# Altium PCB 电梯主控板V2.1.PcbDoc
Units mil, origin at the board's own origin, x right, y up, seen from the top; angles counter-clockwise.
Board outline 3518.03 x 3910.03 mil, 2 copper layers (Top Layer, Bottom Layer); 83 components, 106 nets, 399 pads, 129 vias.
Unrouted connection lines stored in the file: 6.
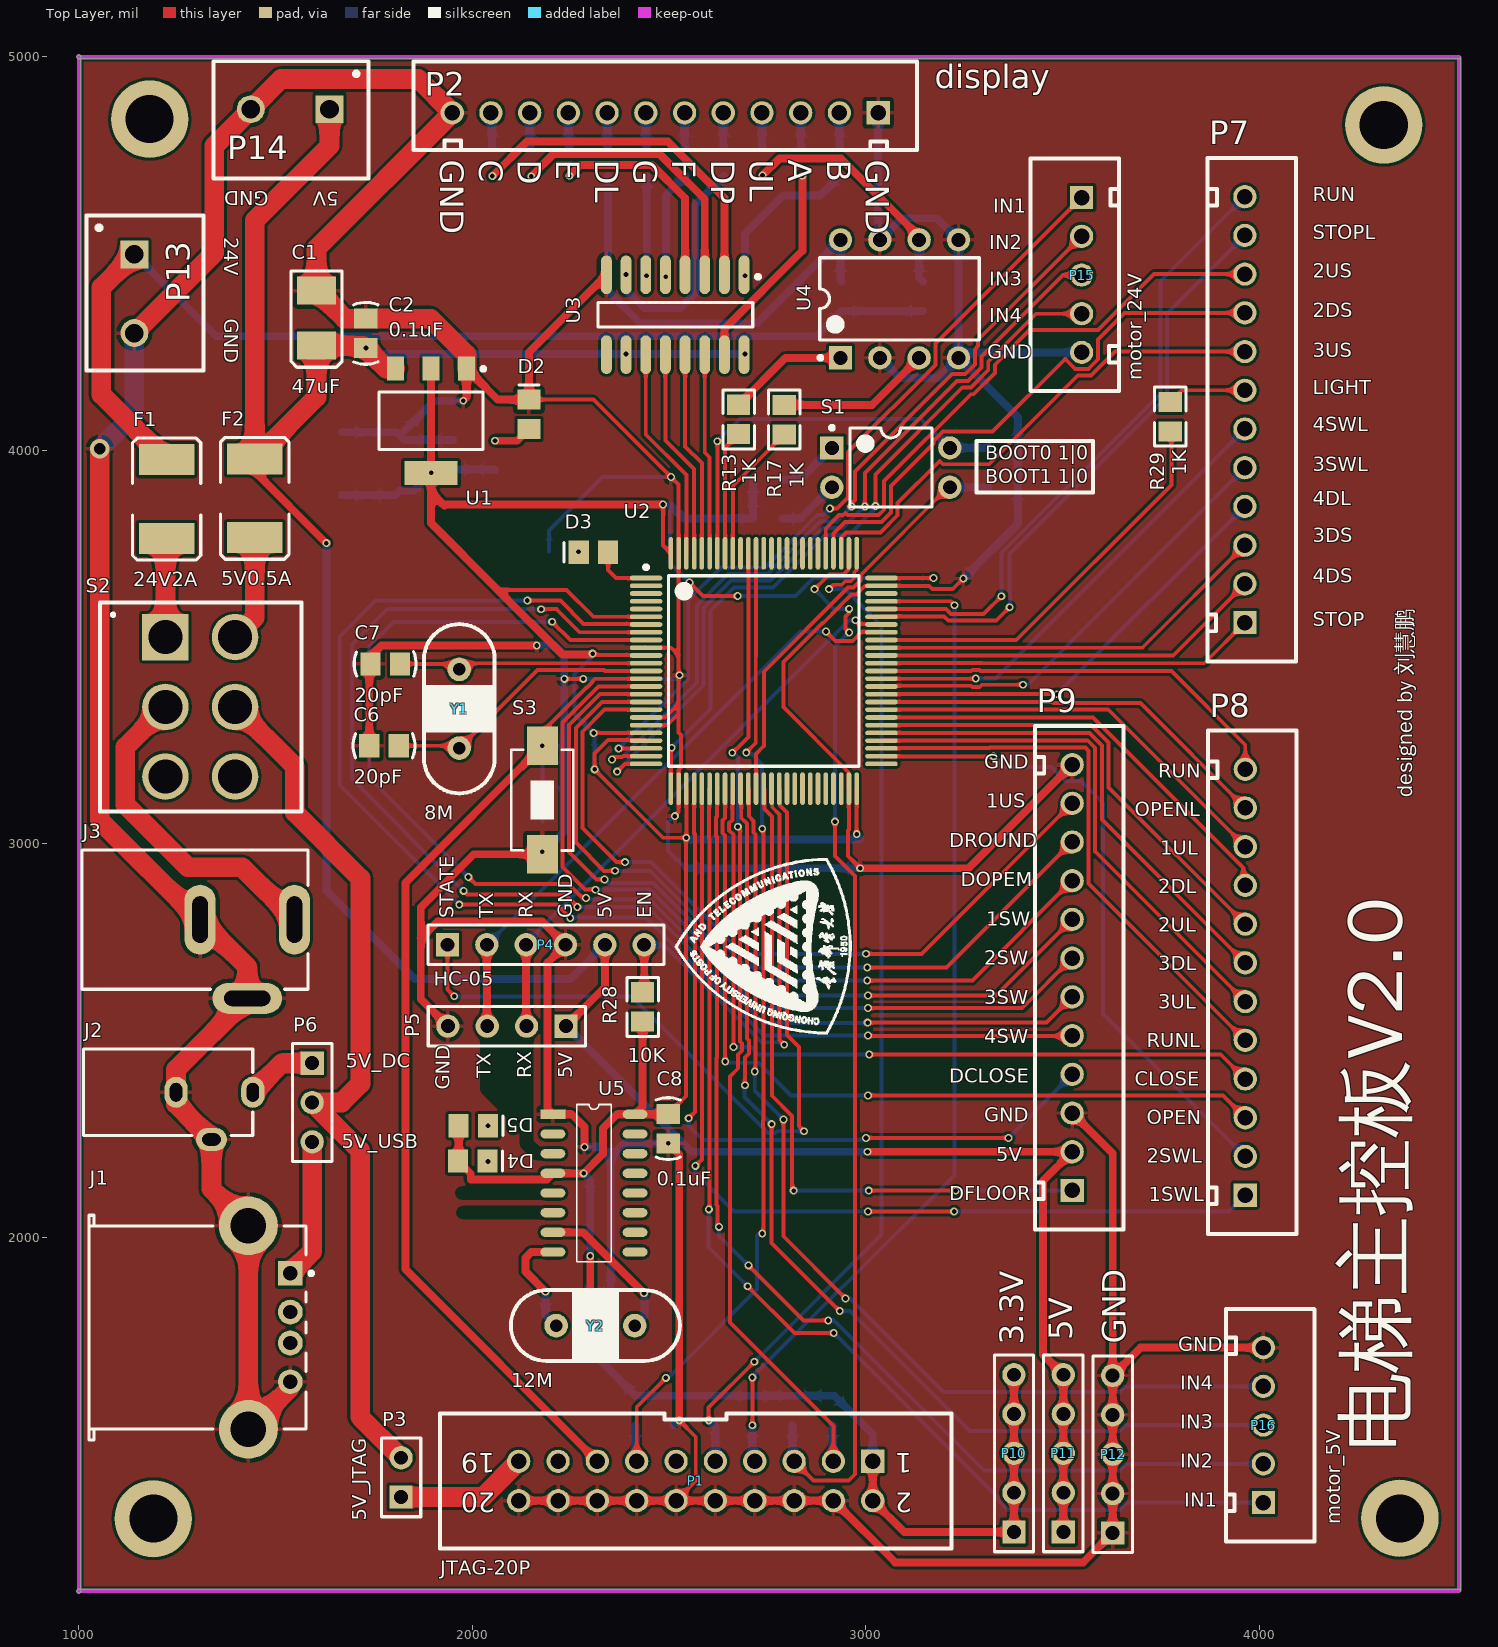
[diagram p0: Top Layer view]
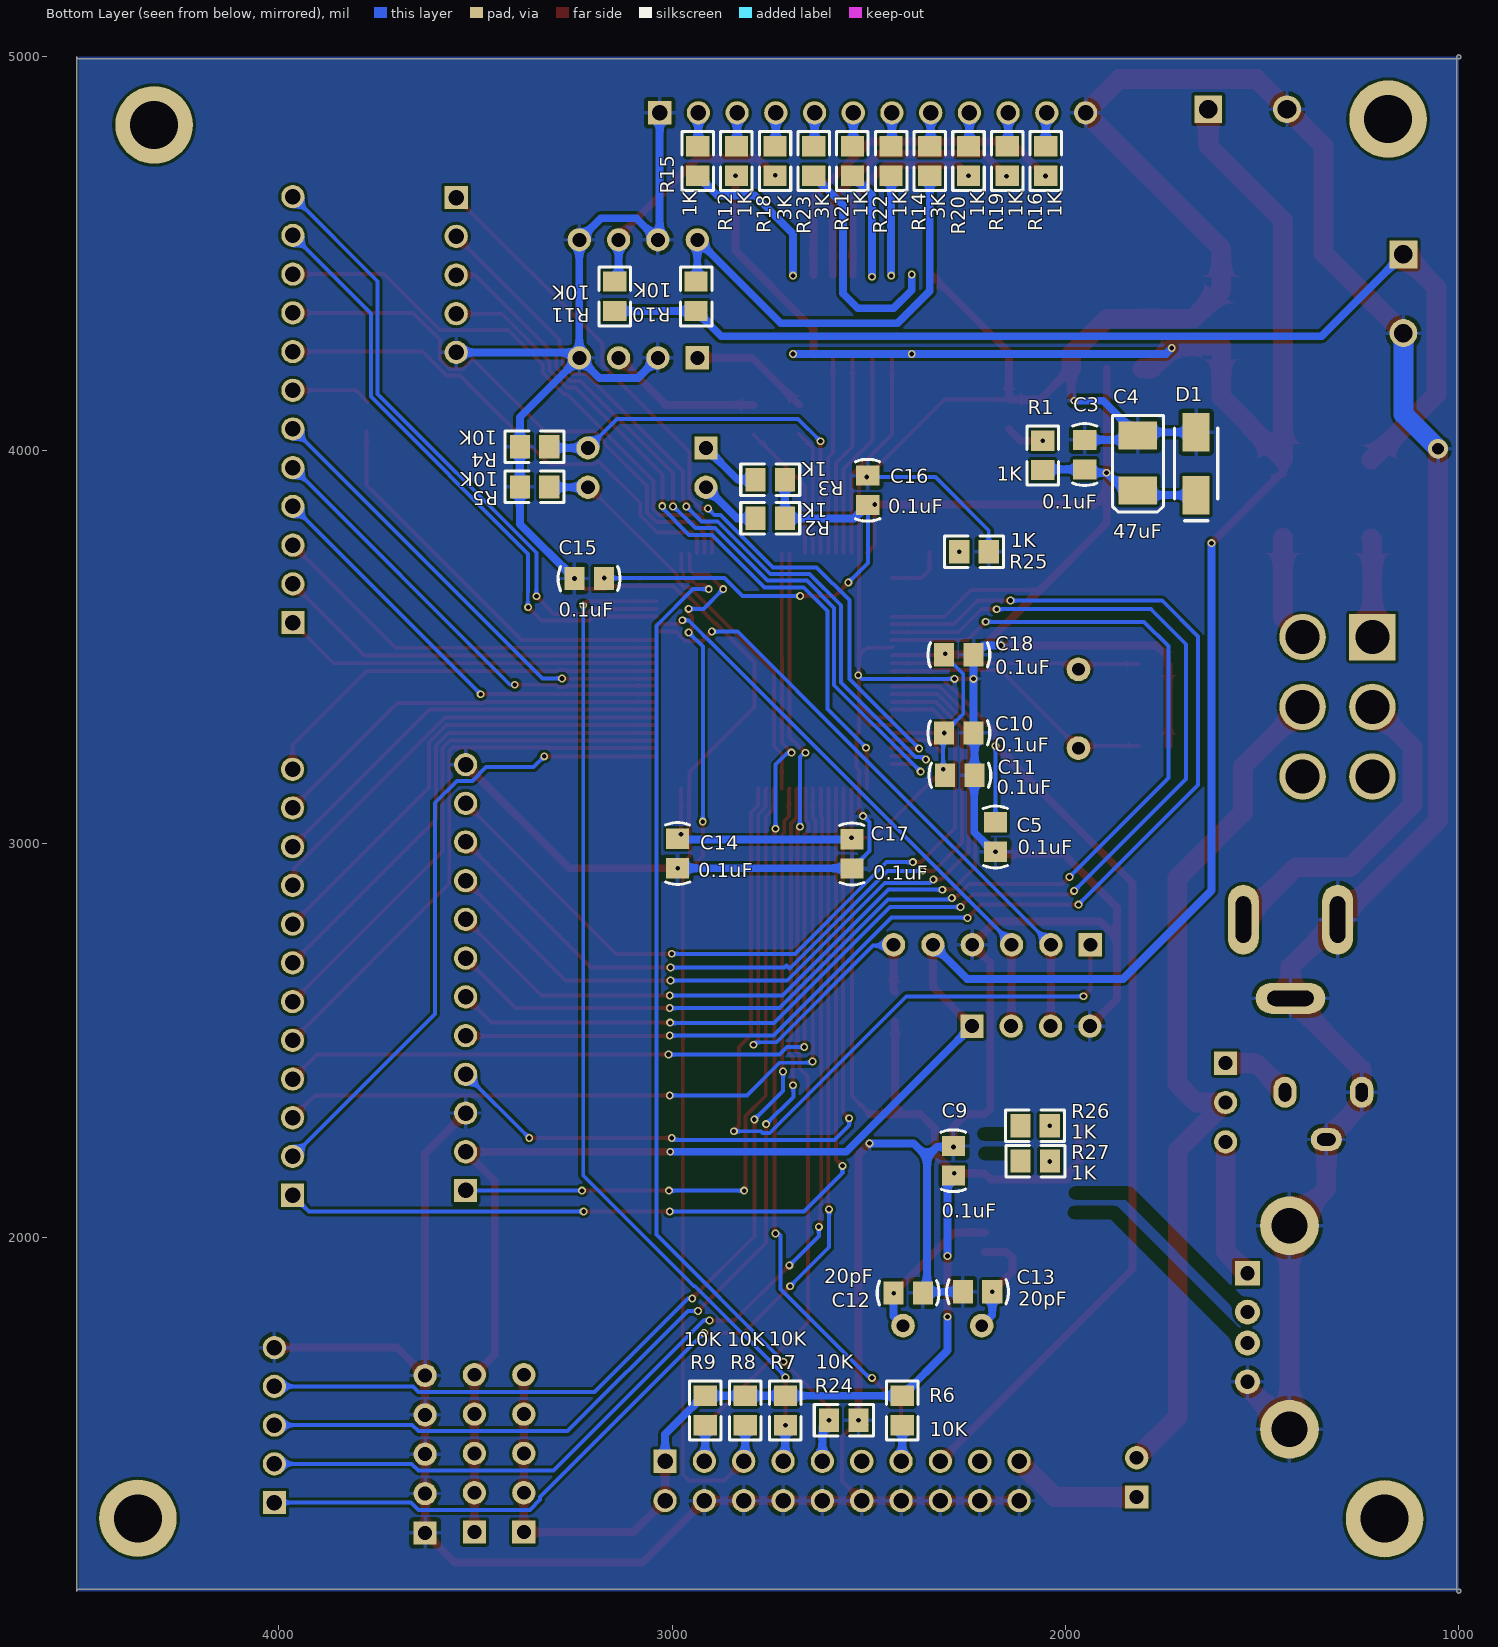
[diagram p1: Bottom Layer view, seen from below]
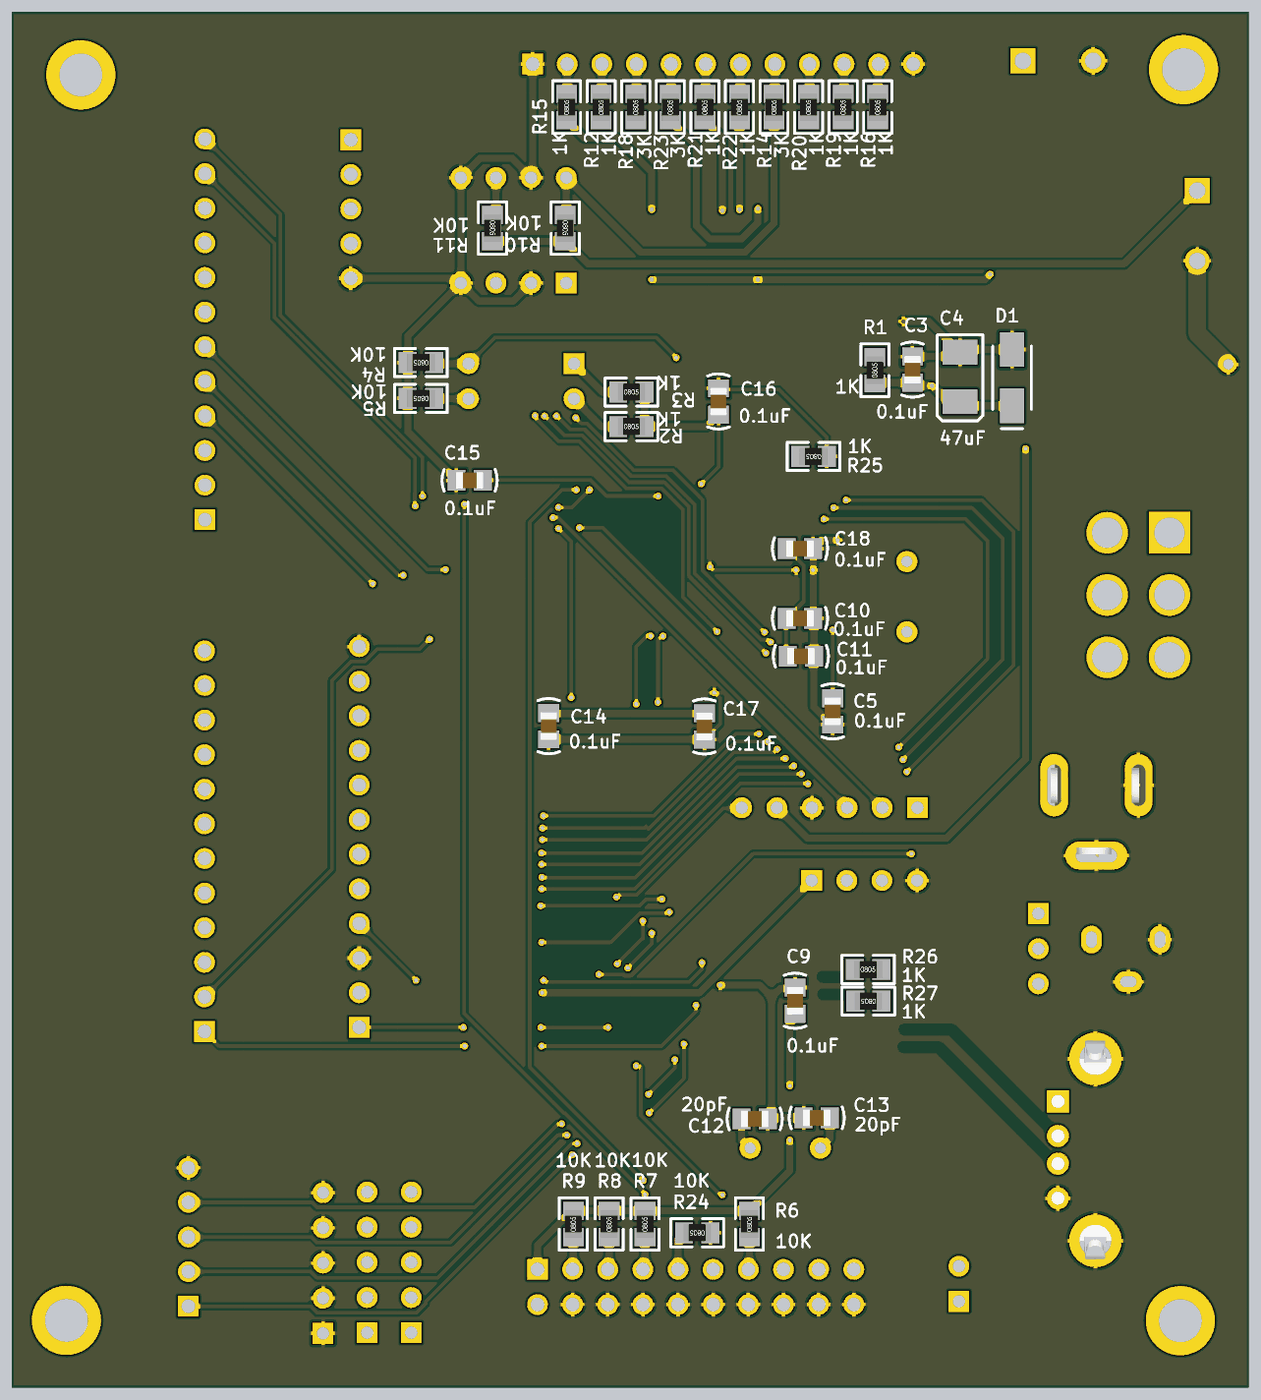
[diagram p2: 3D render of the assembled board from below, using the file's embedded part models]

## Layer stack, top to bottom
Top Solder: solder mask 0.4, Solder Resist, Dk 3.5
Top Layer: signal copper 1.4
Dielectric 1: dielectric 12.6, FR-4, Dk 4.8
Bottom Layer: signal copper 1.4
Bottom Solder: solder mask 0.4, Solder Resist, Dk 3.5

## Board outline
994.99,1100 cw(c1000,1100) 1000,1105.02 4508,1105.02 cw(c4508,1100) 4513.02,1100 4513.02,5000 cw(c4508,5000) 4508,4994.98 1000,4994.98 cw(c1000,5000) 994.99,5000 cw(c1000,5000) 1000,5005.02 cw(c1000,5000) 1005.01,5000 1005.01,1100 cw(c1000,1100) 1000,1094.98 cw(c1000,1100)

## Design rules (kind name [scope] priority, off if disabled: settings)
Clearance [All] p1: gap=7 ignorepadtopadclearanceinfootprint=FALSE
HoleSize [All] p1: absolutevalues=TRUE maxlimit=200 minlimit=1 maxpercent=80.000 minpercent=20.000
MinimumSolderMaskSliver [All] p1: minsoldermaskwidth=3
PolygonConnect [All] p1: connectstyle=Relief reliefconductorwidth=10 reliefentries=4 polygonreliefangle="90 Angle" airgapwidth=10
RoutingVias [All] p1: holewidth=12 width=20 viastyle="Through Hole" minholewidth=12 minwidth=20 maxholewidth=40 maxwidth=50
SilkToSilkClearance [All] p1: silktosilkclearance=3
SilkToSolderMaskClearance [IsPad] p1: minsilkscreentomaskgap=3 clearancetoexposedcopper=TRUE
SolderMaskExpansion [All] p1: expansion=4
UnRoutedNet [All] p1: checkbadconnections=TRUE
Width [All] p1: maxlimit=50 minlimit=9 preferedwidth=20
25 further rules are at their usual default settings.

## Components (designator, comment, footprint, x,y, rotation, side; value= is the part's Value field where it differs from the comment)
C1 "47uF" CAP-3528 1604,4336 r90 top
C2 "0.1uF" C-0805 1729,4297.4 r270 top
C3 "0.1uF" C-0805 1951,3989 r270 bottom
C4 "47uF" CAP-3528 1816,3968 r90 bottom
C5 "0.1uF" C-0805 2178,3017 r270 bottom
C6 "20pF" C-0805 1775.6,3249 r180 top
C7 "20pF" C-0805 1778.6,3457 r180 top
C8 "0.1uF" C-0805 2498,2275.6 r90 top
C9 "0.1uF" C-0805 2285,2194 r270 bottom
C10 "0.1uF" C-0805 2271.12,3281.52 r0 bottom
C11 "0.1uF" C-0805 2268.6,3174 r0 bottom
C12 "20pF" C-0805 2400,1858 r0 bottom
C13 "20pF" C-0805 2223.6,1861 r180 bottom
C14 "0.1uF" C-0805 2986,2975 r90 bottom
C15 "0.1uF" C-0805 3211,3674 r180 bottom
C16 "0.1uF" C-0805 2503,3898.4 r270 bottom
C17 "0.1uF" C-0805 2543,2974 r90 bottom
C18 "0.1uF" C-0805 2271.12,3480 r0 bottom
D1 "Diode-Schottky" D-SMA 1668,3966 r270 bottom
D2 "LED0" LED-0805 2144,4091.4 r90 top
D3 "LED0" LED-0805 2308,3741 r180 top
D4 "LED0" LED-0805 2001.4,2193 r0 top
D5 "LED0" LED-0805 2002.6,2283 r0 top
F1 "24V2A" 1812 1223,3876 r90 top
F2 "5V0.5A" 1812 1447,3878 r90 top
J1 "USB" USB_A1 1026,1770 r180 top
J2 "PWRCON-5V" DC-002 1442,2368 r0 top
J3 "PWRCON-24V" DC-005 1588,2807 r0 top
P1 "JTAG-20P" DC3-20P 3018,1430 r180 top locked
P2 "display" 2.54XH-12P 3031.7,4858 r270 top
P3 "Header 2" HDR1X2 1819,1339 r90 top
P4 "HC-05" HDR1X6 1937,2743 r0 top
P5 "Header 4" HDR1X4 2238,2536 r180 top
P6 "Header 3" HDR1X3 1593,2442 r270 top
P7 "2.54XH-12P" 2.54XH-12P 3964,3562.02 r180 top
P8 "2.54XH-12P" 2.54XH-12P 3965,2106.45 r180 top
P9 "2.54XH-12P" 2.54XH-12P 3525,2118.45 r180 top
P10 "3.3V" HDR1X5 3377,1250 r90 top
P11 "5V" HDR1X5 3502.5,1250 r90 top
P12 "GND" HDR1X5 3628,1248 r90 top
P13 "KF301-2P" KF301-2P 1141,4498 r0 top
P14 "KF301-2P" KF301-2P 1637,4867 r270 top
P15 "motor_24V" 2.54xh-5P 3549,4642.43 r0 top
P16 "motor_5V" 2.54xh-5P 4011,1325.15 r180 top
R1 "1K" 0805-1 2058,3987 r90 bottom
R2 "1K" 0805-1 2750.6,3827 r180 bottom
R3 "1K" 0805-1 2750.6,3925 r180 bottom
R4 "10K" 0805-1 3349.6,4009 r0 bottom
R5 "10K" 0805-1 3349.6,3907 r0 bottom
R6 "10K" 0805-1 2415,1559 r90 bottom
R7 "10K" 0805-1 2712,1559 r90 bottom
R8 "10K" 0805-1 2814,1559 r90 bottom
R9 "10K" 0805-1 2916,1559 r90 bottom
R10 "10K" 0805-1 2939,4391.4 r270 bottom
R11 "10K" 0805-1 3146,4391.4 r270 bottom
R12 "1K" 0805-1 2836.67,4735.4 r90 bottom
R13 "1K" 0805-1 2677,4078.4 r90 top
R14 "3K" 0805-1 2345,4735.4 r90 bottom
R15 "1K" 0805-1 2935,4735.4 r90 bottom
R16 "1K" 0805-1 2050,4735.4 r90 bottom
R17 "1K" 0805-1 2793,4078 r90 top
R18 "3K" 0805-1 2738.33,4735.4 r90 bottom
R19 "1K" 0805-1 2148.33,4735.4 r90 bottom
R20 "1K" 0805-1 2246.67,4735.4 r90 bottom
R21 "1K" 0805-1 2541.67,4735.4 r90 bottom
R22 "1K" 0805-1 2443.33,4735.4 r90 bottom
R23 "3K" 0805-1 2640,4735.4 r90 bottom
R24 "10K" 0805-1 2563.6,1534 r0 bottom
R25 "1K" 0805-1 2232.6,3742 r0 bottom
R26 "1K" 0805-1 2077.4,2283 r180 bottom
R27 "1K" 0805-1 2076.6,2193 r0 bottom
R28 "10K" 0805-1 2433,2585 r90 top
R29 "1K" 0805-1 3774,4085.4 r90 top
S1 "SW DIP-2" DIP-4 3064,3956 r0 top
S2 "六脚钮子开关" 六脚纽子开关 1220,3525 r0 top
S3 "SW-PB" SW_PB2_A1 2178,3108.59 r0 top locked
U1 "ASM1117" SOT223 1895,4075 r180 top
U2 "STM32F103V" LQFP-100 2741,3439 r0 top locked
U3 "74HC595" SOIC-16 2516,4344.46 r270 top
U4 "TP521-2" DIP8 2885,4234 r90 top
U5 "CH340G" SOP16 2205,2312 r0 top
Y1 "8M" X-HC-49S 1967,3343 r90 top
Y2 "12M" X-HC-49S 2313,1775 r0 top

## Footprints (in the part's own frame and the unit in brackets; to place one, negate y for a bottom-side part, rotate by r counter-clockwise, add the part's x,y. Pads: shape width x height; smd on the part's side, far side on the other; paste and mask are expansions set on the pad)
2.54xh-5P [mm]
  rect 1.5x1.5 hole 1: 1(0,0)
  round 1.5 hole 1: 2(0,-2.5) 3(0,-5) 4(0,-7.5) 5(0,-10)
  silkscreen extent -3.3,-12.5 2.41,2.51
2.54XH-12P [mm]
  rect 1.5x1.5 hole 1: 1(0,0)
  round 1.5 hole 1: 2(0,-2.5) 3(0,-5) 4(0,-7.5) 5(0,-10) 6(0,-12.5) 7(0,-15) 8(0,-17.5) 9(0,-20) 10(0,-22.5) 11(0,-25) 12(0,-27.5)
  silkscreen extent -3.3,-30 2.41,2.51
0805-1 [mm] "0805带丝印"
  rect 1.3x1.5 smd: 1(-0.95,0) 2(0.95,0)
  silkscreen extent -1.91,-1.02 1.91,1.02, body extent -1,-0.62 1,0.63, height 0.5
1812 [mm] "贴片元件"
  rect 2x3.6 smd: 1(-2.54,0) 2(2.54,0)
  silkscreen extent -3.94,-2.2 3.94,2.2, body extent -2.79,-1.65 2.79,1.65, height 1.2
C-0805 [mm] "贴片电容"
  rect 1.3x1.5 smd: 1(-0.95,0) 2(0.95,0)
  silkscreen extent -2,-0.79 2,0.79, body extent -1,-0.6 1,0.6, height 0.95
CAP-3528 [mm] "钽电容"
  rect 1.8x2.5 smd: 1(-1.778,0) 2(1.778,0)
  silkscreen extent -3.17,-1.65 3.05,1.65, body extent -1.91,-1.4 1.91,1.4, height 1.1
D-SMA [mm] "贴片二极管"
  rect 2.5x1.75 smd: 1(-2.032,0) 2(2.032,0)
  silkscreen extent -2.29,-1.4 3.68,1.4
DC3-20P [mm]
  rect 1.5x1.5 hole 1: 1(0,0)
  round 1.5 hole 1: 2(0,2.54) 3(2.54,0) 4(2.54,2.54) 5(5.08,0) 6(5.08,2.54) 7(7.62,0) 8(7.62,2.54) 9(10.16,0) 10(10.16,2.54) 11(12.7,0) 12(12.7,2.54) 13(15.24,0) 14(15.24,2.54) 15(17.78,0) 16(17.78,2.54) 17(20.32,0) 18(20.32,2.54) 19(22.86,0) 20(22.86,2.54)
  silkscreen extent -5.08,-3.07 27.94,5.64
DC-002 [mm] "DC电源插座"
  oval 1.5x2 hole 0.8 slot 1.2 at 90 deg: 1(0,0) 2(-4.953,0)
  oval 2x1.5 hole 0.8 slot 1.2 at 0 deg: 3(-2.667,-3.048)
  silkscreen extent -10.92,-2.79 0,2.79, body extent -10.92,-2.79 0,2.79, height 7.2
DC-005 [mm] "DC电源插座"
  oval 2x4.5 hole 1 slot 3 at 90 deg: 1(-1.016,0) 2(-7.112,0)
  oval 4.5x2 hole 1 slot 3 at 0 deg: 3(-4.064,-5.08)
  silkscreen extent -14.73,-4.5 -0.13,4.5, body extent -14.59,-5.01 -0.76,4.5, height 11.02
DIP8 [mm]
  rect 1.5x1.5 hole 0.9: 1(0.025,-1.295)
  round 1.5 hole 0.9: 2(0.025,-3.835) 3(0.025,-6.375) 4(0.025,-8.915) 5(7.645,-8.915) 6(7.645,-6.375) 7(7.645,-3.835) 8(7.645,-1.295)
  silkscreen extent -0.1,-10.26 6.49,0.13, body extent 0.24,-10.26 7.44,0.04, height 5.08
DIP-4 [mm] "DIP; 4 Leads; Row Spacing 7.62 mm; Pitch 2.54 mm"
  rect 1.5x1.5 hole 0.9: 1(-3.81,1.27)
  round 1.5 hole 0.9: 2(-3.81,-1.27) 3(3.81,-1.27) 4(3.81,1.27)
  silkscreen extent -3.93,-2.55 2.65,2.69, body extent -3.15,-2.5 3.15,2.5, height 5.6
HDR1X2 [mm] "Connector; Header; 2 Position"
  rect 1.5x1.5 hole 0.9: 1(0,0)
  round 1.5 hole 0.9: 2(2.54,0)
  silkscreen extent -1.27,-1.27 3.81,1.27
HDR1X3 [mm] "Connector; Header; 3 Position"
  rect 1.5x1.5 hole 0.9: 1(0,0)
  round 1.5 hole 0.9: 2(2.54,0) 3(5.08,0)
  silkscreen extent -1.27,-1.27 6.35,1.27
HDR1X4 [mm] "Connector; Header; 4 Position"
  rect 1.5x1.5 hole 0.9: 1(0,0)
  round 1.5 hole 0.9: 2(2.54,0) 3(5.08,0) 4(7.62,0)
  silkscreen extent -1.27,-1.27 8.89,1.27
HDR1X5 [mm] "Connector; Header; 5 Position"
  rect 1.5x1.5 hole 0.9: 1(0,0)
  round 1.5 hole 0.9: 2(2.54,0) 3(5.08,0) 4(7.62,0) 5(10.16,0)
  silkscreen extent -1.27,-1.27 11.43,1.27
HDR1X6 [mm] "Connector; Header; 6 Position"
  rect 1.5x1.5 hole 0.9: 1(0,0)
  round 1.5 hole 0.9: 2(2.54,0) 3(5.08,0) 4(7.62,0) 5(10.16,0) 6(12.7,0)
  silkscreen extent -1.27,-1.27 13.97,1.27
KF301-2P [mm]
  rect 1.8x1.8 hole 1.2: 1(0,0)
  round 1.8 hole 1.2: 2(0,-5.08)
  silkscreen extent -3.1,-7.49 4.47,2.51
LED-0805 [mm] "贴片LED"
  rect 1.3x1.5 smd: 1(-0.95,0) 2(0.95,0)
  silkscreen extent 1.91,-0.63 1.91,0.64
LQFP-100 [mm] "LQFP"
  oval 2.1x0.3 smd: 1(-7.6,6) 2(-7.6,5.5) 3(-7.6,5) 4(-7.6,4.5) 5(-7.6,4) 6(-7.6,3.5) 7(-7.6,3) 8(-7.6,2.5) 9(-7.6,2) 10(-7.6,1.5) 11(-7.6,1) 12(-7.6,0.5) 13(-7.6,0) 14(-7.6,-0.5) 15(-7.6,-1) 16(-7.6,-1.5) 17(-7.6,-2) 18(-7.6,-2.5) 19(-7.6,-3) 20(-7.6,-3.5) 21(-7.6,-4) 22(-7.6,-4.5) 23(-7.6,-5) 24(-7.6,-5.5) 25(-7.6,-6) 51(7.6,-6) 52(7.6,-5.5) 53(7.6,-5) 54(7.6,-4.5) 55(7.6,-4) 56(7.6,-3.5) 57(7.6,-3) 58(7.6,-2.5) 59(7.6,-2) 60(7.6,-1.5) 61(7.6,-1) 62(7.6,-0.5) 63(7.6,0) 64(7.6,0.5) 65(7.6,1) 66(7.6,1.5) 67(7.6,2) 68(7.6,2.5) 69(7.6,3) 70(7.6,3.5) 71(7.6,4) 72(7.6,4.5) 73(7.6,5) 74(7.6,5.5) 75(7.6,6)
  oval 0.3x2.1 smd: 26(-6,-7.6) 27(-5.5,-7.6) 28(-5,-7.6) 29(-4.5,-7.6) 30(-4,-7.6) 31(-3.5,-7.6) 32(-3,-7.6) 33(-2.5,-7.6) 34(-2,-7.6) 35(-1.5,-7.6) 36(-1,-7.6) 37(-0.5,-7.6) 38(0,-7.6) 39(0.5,-7.6) 40(1,-7.6) 41(1.5,-7.6) 42(2,-7.6) 43(2.5,-7.6) 44(3,-7.6) 45(3.5,-7.6) 46(4,-7.6) 47(4.5,-7.6) 48(5,-7.6) 49(5.5,-7.6) 50(6,-7.6) 76(6,7.6) 77(5.5,7.6) 78(5,7.6) 79(4.5,7.6) 80(4,7.6) 81(3.5,7.6) 82(3,7.6) 83(2.5,7.6) 84(2,7.6) 85(1.5,7.6) 86(1,7.6) 87(0.5,7.6) 88(0,7.6) 89(-0.5,7.6) 90(-1,7.6) 91(-1.5,7.6) 92(-2,7.6) 93(-2.5,7.6) 94(-3,7.6) 95(-3.5,7.6) 96(-4,7.6) 97(-4.5,7.6) 98(-5,7.6) 99(-5.5,7.6) 100(-6,7.6)
  silkscreen extent -7.72,-6.15 6.15,6.82, body extent -7,-7 7,7, height 0.8
SOIC-16 [mm]
  oval 2.5x0.7 smd: 1(-2.577,4.445) 2(-2.577,3.175) 3(-2.577,1.905) 4(-2.577,0.635) 5(-2.577,-0.635) 6(-2.577,-1.905) 7(-2.577,-3.175) 8(-2.577,-4.445) 9(2.577,-4.445) 10(2.577,-3.175) 11(2.577,-1.905) 12(2.577,-0.635) 13(2.577,0.635) 14(2.577,1.905) 15(2.577,3.175) 16(2.577,4.445)
  silkscreen extent -2.57,-5 0.8,5.47, body extent -2.88,-4.92 2.92,4.88, height 1.75
SOP16 [mm]
  rect 1.6x0.6 smd: 1(0,0)
  oval 1.6x0.6 smd: 2(0,-1.27) 3(0,-2.54) 4(0,-3.81) 5(0,-5.08) 6(0,-6.35) 7(0,-7.62) 8(0,-8.89) 9(5.3,-8.89) 10(5.3,-7.62) 11(5.3,-6.35) 12(5.3,-5.08) 13(5.3,-3.81) 14(5.3,-2.54) 15(5.3,-1.27) 16(5.3,0)
  silkscreen extent 1.54,-9.53 3.76,0.64
SOT223 [mm]
  rect 1.1x1.55 smd: 1(-2.3,-3.375) 2(0,-3.375) 3(2.3,-3.375)
  rect 3.45x1.55 smd: 4(0,3.375)
  silkscreen extent -3.5,-3.48 3.35,1.85, body extent -3.25,-3.48 3.25,3.48, height 1.7
SW_PB2_A1 [mm]
  rect 2x2.5 smd: 1(0,3.556) 2(0,-3.444)
  silkscreen extent -2,-3.19 2,3.31, body extent -1.93,-3.94 1.92,3.95, height 2.5
USB_A1 [mm]
  rect 1.6x1.6 hole 0.92: 1(-12.99,-3.5)
  round 1.6 hole 0.92: 2(-12.99,-1) 3(-12.99,1) 4(-12.99,3.5)
  round 3.8 hole 2.3: 5(-10.28,6.57) 6(-10.28,-6.57)
  silkscreen extent -14.47,-7.25 0,7.25, body extent -14.16,-7.9 0,7.9, height 7.55
X-HC-49S [mil] "插件晶振"
  round 60 hole 32: 1(-100,0) 2(100,0)
  silkscreen extent -215,-90 215,90
六脚纽子开关 [mm]
  rect 3x3 hole 2.2: 1(0,0)
  round 3 hole 2.2: 2(0,-4.5) 3(0,-9) 4(4.5,-9) 5(4.5,-4.5) 6(4.5,0)
  silkscreen extent -4.22,-11.25 8.79,2.24

## Part data
C1 C4: library part Cap-Pol-A, "钽电容", combak=Cap-Pol, LatestRevisionDate=17-Jul-2002, LatestRevisionNote="Re-released for DXP Platform.", PackageReference=RB7.6-15, Published=8-Jun-2000, Publisher="Altium Limited"
C2 C3 C5 C6 C7 C8 C9 C10 C11 C12 C13 C14 C15 C16 C17 C18: library part Cap-S, "贴片瓷片电容", combak=Cap-S, LatestRevisionDate=17-Jul-2002, LatestRevisionNote="Re-released for DXP Platform.", PackageReference=RAD-0.3, Published=8-Jun-2000, Publisher="Altium Limited"
D1: "肖特基二极管", Code_JEDEC=DO-214-AA, combak=Diode-Schottky, LatestRevisionDate=17-Jul-2002, LatestRevisionNote="Re-released for DXP Platform.", PackageReference=SMB, Published=8-Jun-2000, Publisher="Altium Limited", Type=SS14
D2 D3 D4 D5: "发光二极管", LatestRevisionDate=08-Jul-2005, LatestRevisionNote="Mech Layer 1 removed.", PackageReference=LED-0, Published=8-Jun-2000, Publisher="Altium Limited"
  D2 D4 D5: combak=LED0
F1 F2: library part Fuse2, "可恢复保险丝", combak=Fuse2, LatestRevisionDate=17-Jul-2002, LatestRevisionNote="Re-released for DXP Platform.", PackageReference=PIN-W2/E2.8, Published=8-Jun-2000, Publisher="Altium Limited"
J1: "USB接口", combak=USB
J2 J3: library part PWRCON, "直流电源端子", ComponentLink1Description="Manufacturer Link", ComponentLink1URL=http://domino.kycon.com/internet/Products.html, DatasheetDocument=09-May-2002, Published=17-Dec-2003, Publisher="Altium Limited"
  J2: combak=PWRCON-5V
  J3: combak=PWRCON-24V
P2: library part 2.54XH-12P
P3: "Header, 2-Pin", combak="Header 2", LatestRevisionDate=17-Jul-2002, LatestRevisionNote="Re-released for DXP Platform.", Publisher="Altium Limited"
P4: library part "Header 6", "Header, 6-Pin", combak=HC-05, LatestRevisionDate=17-Jul-2002, LatestRevisionNote="Re-released for DXP Platform.", Publisher="Altium Limited"
P5: "Header, 4-Pin", combak="Header 4", LatestRevisionDate=17-Jul-2002, LatestRevisionNote="Re-released for DXP Platform.", Publisher="Altium Limited"
P6: "Header, 3-Pin", combak="Header 3", LatestRevisionDate=17-Jul-2002, LatestRevisionNote="Re-released for DXP Platform.", Publisher="Altium Limited"
P10 P11 P12: library part "Header 5", "Header, 5-Pin", LatestRevisionDate=17-Jul-2002, LatestRevisionNote="Re-released for DXP Platform.", Publisher="Altium Limited"
P15 P16: library part 2.54XH-5P
R1 R2 R3 R4 R5 R6 R7 R8 R9 R10 R11 R12 R13 R14 R15 R16 R17 R18 R19 R20 R21 R22 R23 R24 R25 R26 R27 R28 R29: library part Res1, "贴片电阻", LatestRevisionDate=17-Jul-2002, LatestRevisionNote="Re-released for DXP Platform.", PackageReference=AXIAL-0.4, Published=8-Jun-2000, Publisher="Altium Limited"
  R1 R6 R7 R8 R9 R10 R11 R12 R13 R14 R15 R16 R17 R18 R19 R20 R21 R22 R23 R24 R26 R27: combak=Res1
S1: "DIP Switch, 2 Position, SPST", combak="SW DIP-2", LatestRevisionDate=17-Jul-2002, LatestRevisionNote="Re-released for DXP Platform.", PackageReference=DIP-4, Published=24-Mar-1999, Publisher="Altium Limited"
S3: "微动开关", combak=SW-PB, LatestRevisionDate=17-Jul-2002, LatestRevisionNote="Re-released for DXP Platform.", PackageReference=SPST-2, Published=24-Mar-1999, Publisher="Altium Limited"
U1: "3.3V稳压芯片", combak=ASM1117
U2: "STM32单片机100引脚", combak=STM32F103V
U3: "移位寄存器", combak=74HC595, ComponentAvailability="Not for New Design", ComponentLink1Description="Manufacturer Link", ComponentLink1URL=http://www.onsemi.com/, ComponentLink2Description=Datasheet, ComponentLink2URL=http://www.onsemi.com/pub/Collateral/MC74VHC595-D.PDF, DatasheetVersion=1997, LatestRevisionDate=13-Apr-2006, LatestRevisionNote="IPC-7351 Footprint Added.", PackageDescription="16-Pin Small Outline Package 1.27 mm Pitch", PackageReference=966-01, PackageVersion=1997, Published=15-Apr-2002, Publisher="Altium Limited"
U4: library part P521-2, combak=TP521-2
Y1 Y2: library part XTAL, "晶振", combak=XTAL, LatestRevisionDate=17-Jul-2002, LatestRevisionNote="Re-released for DXP Platform.", PackageReference=R38, Published=8-Jun-2000, Publisher="Altium Limited"
P1: combak=JTAG-20P
P7 P8 P9: Comment-bak=2.54XH-12P
S2: combak=六脚钮子开关
U5: combak=CH340G

## Free pads (board coordinates)
  round 0 on Mech16 paste+0 mask+0: 1(2503,1770) 1(3707,2439) 1(3732,2464)
  round 196.85 hole 122.05: 2(1189,1284) 3(1180,4842) 4(4317,4827) 5(4358,1285)

## Via types
v1: diameter 20, hole 12, Top Layer to Bottom Layer, 128 vias
v2: diameter 50, hole 30, Top Layer to Bottom Layer, 1 vias

## Nets (pads, with @x,y where several pads share a name; then routed paths per layer and width w, separated by ;. In a path a pad name is that pad's centre, name@x,y a point inside that pad or via, vN(x,y) a via of type N, cw(c..) or ccw(c..) an arc to the next point about the centre after c; other vN are vias at no path point)
1SW: P9.8 U2.15 | length 2134
  Top Layer w10: v1(2313,2883) 2312,2884 2286,2884 2229.37,2940.63 2229.37,3308.37 2320.63,3399.63 U2.15 ; v1@3001,2614 v1(3006,2614) 3331.57,2614 P9.8
  Bottom Layer w10: v1(2313,2883) 2450.08,2883 2719.08,2614 v1(3006,2614)
1SWL: P8.1 U2.30 | length 2440.2
  Top Layer w10: v1(2567,2181) 2583.52,2197.52 U2.30 ; v1(3006,2065) v1(3225,2065)
  Bottom Layer w10: v1(2567,2181) 2567,2165 2566,2164 2665,2065 v1(3006,2065) ; v1(3225,2065) 3923.55,2065 P8.1
1UL: P8.10 U2.58 | length 1069.1
  Top Layer w10: U2.58 3616.7,3340.57 P8.10
1US: P9.11 U2.18 | length 1965
  Top Layer w10: v1(2388,2953) 2367,2953 2280.37,3039.63 2280.37,3284.48 2336.46,3340.57 U2.18 ; v1(3001,2720) 3142.3,2720 P9.11
  Bottom Layer w10: v1(2388,2953) 2454.51,2953 2501.47,2906.04 2687.51,2720 v1(3001,2720)
2DL: P8.9 U2.57 | length 1124.9
  Top Layer w10: U2.57 3577.66,3320.89 3960.17,2938.38 3960.17,2898.68 P8.9
2DS: P7.9 U2.79 | length 1420.9
  Top Layer w10: U2.79 2918.17,3788.95 2947.21,3818 3040.15,3818 3064,3841.85 3064,3909 3172.47,4017.47 3172.47,4023.2 3196.8,4047.53 3322.53,4047.53 3506.52,4231.52 3507.47,4231.52 3531.8,4207.2 3566.2,4207.2 3590.53,4231.52 3590.53,4281.58 3658.37,4349.43 P7.9
2SW: P9.7 U2.9 | length 3166.4
  Top Layer w10: v1(1990,2915) 2008,2897 2245.11,2897 2281.11,2861 2282.11,2862 v1(2289,2862) ; v1(2203,3564) 2249.26,3517.74 U2.9 ; v1(3006,2582) 3398,2582 P9.7
  Bottom Layer w10: v1(1990,2915) 1738,3167 1738,3502 1800,3564 v1(2203,3564) ; v1(2289,2862) 2293,2858 2451.04,2858 2727.04,2582 v1(3006,2582)
2SWL: P8.2 U2.52 | length 1660.9
  Top Layer w10: U2.52 3040.68,3222 v1(3325,3222)
  Bottom Layer w10: v1(3325,3222) 3352.47,3194.53 3472.87,3194.53 3507.8,3159.6 3547.4,3159.6 3603,3104 3603,2566.87 P8.2
2UL: P8.8 U2.56 | length 1201.1
  Top Layer w10: U2.56 3573.3,3301.2 3617.53,3256.98 3617.53,3142.9 P8.8
2US: P7.10 U2.80 | length 1456.3
  Top Layer w10: U2.80 2898.48,3801.37 2932.11,3835 2942.26,3835 2948.26,3841 2954.26,3835 3033.11,3835 3047,3848.89 3047,3921.77 3267.7,4142.47 3274.33,4142.47 3328.53,4196.67 3328.53,4217.53 3416.62,4305.62 3590.53,4305.62 3732.76,4447.85 P7.10
3.3V: C3.2 C4.1 C8.2 C9.2 C10.2 C11.2 C14.2 C15.2 C16.2 C17.2 C18.2 D1.2 D4.1 D5.1 P1.1 P1.2 P10.1 P10.2 P10.3 P10.4 P10.5 R1.1 R2.2 R3.2 R6.2 R7.2 R8.2 R9.2 R28.1 U1.2 U1.4 U2.6 U2.11 U2.21 U2.22 U2.28 U2.50 U2.75 U2.100 U5.4 U5.16 | length 9579.3
  Top Layer w10: 2065,3645 2240,3645 2308.2,3576.8 U2.6 ; v1(2306,3483) 2308.85,3480.15 2440.01,3480.15 U2.11 ; v1(2308.52,3281.52) U2.21 ; U2.22 2439.62,3264 2346,3264 2343.83,3261.83 2311,3229 v1(2311,3189) 2485,3015 v1(2544,3015) ; v1(2485,3862) 2485,3757.99 U2.100 ; C8.2 2543,2358 2543,3014 v1(2544,3015) ; U2.28@2544.15,3137.79 2544.15,3015.15 v1(2544,3015) ; v1(2552,3664) 2586.44,3629.56 v1(2674.56,3629.56) ; v1(2977.22,3024.22) U2.50 ; U2.75 v1(3172.38,3675.22)
  Top Layer w20: U1.2 U1.4 1895,3894 ; D5.1 1965.2,2194.2 D4.1 1996.21,2160.79 1996.21,2146.47 2189.47,2146.47 U5.4 v1(2283,2162) 2332,2211 2332,2276 2368,2312 U5.16 ; v1(2300,1797.47) v1(2300,1952) ; v1(2306,3483) 2303.69,3480.69 2229.31,3480.69 2065,3645 1895,3815 1895,3894 ; R28.1 2433,2331.34 U5.16 ; v1(2485,3862) 1932.56,3862 1929.78,3859.22 1895,3894 ; C8.2 2497,2312 U5.16 ; P1.1 P1.2 3098,1250 P10.1 P10.2 P10.3 P10.4 P10.5
  Bottom Layer w10: v1(2306,3483) 2308.52,3480.48 C18.2 2309,3480 2260,3431 2260,3330.04 v1(2308.52,3281.52) 2311,3279.04 v1(2311,3189) ; v1(2485,3862) C16.2@2502,3862 ; C16.2 C16.2@2502,3862 ; v1(2552,3664) 2502,3714 C16.2@2502,3862 ; v1(2674.56,3629.56) 2821.44,3629.56 2867.11,3675.22 v1(3172.38,3675.22)
  Bottom Layer w20: D1.2 1804,3886 C4.1 1850.87,3898 v1(1895.87,3943) 1942.4,3943 C3.2 2056,3951.6 R1.1 ; v1(2283,2162) 2300,2145 v1(2300,1952) ; v1(2300,1797.47) 2300,1711.4 R6.2 R7.2 R8.2 R9.2 2920.36,1596.4 3018,1498.76 P1.1 ; C16.2 2537,3827 R2.2 R3.2 ; v1(2544,3015) 2548,3011 2984.6,3011 C14.2
3DL: P8.7 U2.55 | length 1277.3
  Top Layer w10: U2.55 3568.94,3281.52 3600.53,3249.94 3600.53,3061.47 P8.7
3DS: P7.3 U2.66 | length 1031.8
  Top Layer w10: U2.66 3703.18,3498.06 P7.3
3SW: P9.6 U2.8 | length 3267.9
  Top Layer w10: v1(1978,2880) 1987,2871 2236,2871 2267,2840 v1(2267,2839) ; v1(2175,3596) 2214,3596 2272.57,3537.43 U2.8 ; v1(3005,2545) 3459.43,2545 P9.6
  Bottom Layer w10: v1(1978,2880) 1694,3164 1694,3507 1783,3596 v1(2175,3596) ; v1(2267,2839) 2446,2839 2741,2544 3004,2544 v1(3005,2545)
3SWL: P7.5 U2.61 | length 1157
  Top Layer w10: U2.61 3041.99,3401.41 3267.48,3401.41 3270.89,3398 3289.11,3398 3295.11,3404 v1(3400,3404)
  Bottom Layer w10: v1(3400,3404) 3412.28,3404 P7.5
3UL: P8.6 U2.54 | length 1353.5
  Top Layer w10: U2.54 3564.59,3261.83 3583.53,3242.89 3583.53,2980.05 P8.6
3US: P7.8 U2.78 | length 1288.2
  Top Layer w10: U2.78@2936.89,3738.21 2936.89,3778.32 2950.12,3791.55 3037.75,3791.55 3081,3834.8 3081,3865.73 3188.27,3973 3196.8,3964.47 3313.47,3964.47 3539.2,4190.2 3573.24,4190.2 3634.05,4251 P7.8
4DL: P7.4 U2.60 | length 1121.5
  Top Layer w10: U2.60 3040.27,3380 v1(3486.7,3380)
  Bottom Layer w10: v1(3486.7,3380) P7.4
4DS: P7.2 U2.65 | length 999.2
  Top Layer w10: U2.65 3781.92,3478.37 P7.2
4SW: P9.5 U2.7 | length 3347.3
  Top Layer w10: v1(1967,2845) 2215,2845 v1(2249,2811) ; v1(2140,3618) 2224,3618 2283.11,3558.89 2440.01,3558.89 U2.7 ; v1(3006,2512.15) 3007.15,2511 3523.85,2511 P9.5
  Bottom Layer w10: v1(1967,2845) 1663,3149 1663,3527 1754,3618 v1(2140,3618) ; v1(2249,2811) 2250,2812 2442,2812 2741.85,2512.15 v1(3006,2512.15)
4SWL: P7.6 U2.62 | length 1186.7
  Top Layer w10: U2.62 3279.32,3419.32 v1(3280,3420)
  Bottom Layer w10: v1(3280,3420) 3329.85,3420 P7.6
5V: C1.1 C2.2 F2.2 P4.5 P5.1 P9.2 P11.1 P11.2 P11.3 P11.4 P11.5 P14.1 U1.3 U3.10 U3.16 | length 7206.6
  Top Layer w20: F2.2 1447,3946 v1(1629,3764) ; P5.1 2337,2635 P4.5 ; U3.10@2389,4243 v1(2391,4245) ; U3.16 v1(2693,4245) ; v1(3004.87,2216.87) P9.2 3451,2142.87 3451,1701.5 P11.5 P11.4 P11.3 P11.2 P11.1
  Top Layer w50: P14.1 1637,4774 1447,4584 F2.2 1604,4135 C1.1 C2.2@1723,4266 ; C2.2@1729.5,4259.5 1781.13,4207.87 U1.3
  Bottom Layer w20: v1(1629,3764) 1629,2881 1854,2656 2250,2656 P4.5 ; v1(1730,4260) 1745,4245 v1(2391,4245) v1(2693,4245) ; P5.1 2238.38,2536 2557.51,2216.87 v1(3004.87,2216.87)
5V_DC: J2.1 P6.1 | length 181.7
  Top Layer w50: J2.1 1516,2442 P6.1
5V_IN: P3.2 P6.2 S2.5 | length 2229.4
  Top Layer w50: S2.5 1549,3196 1549,3079 1716,2912 1716,2390 1668,2342 P6.2 1715,2220 1715,1543 P3.2
5V_USB: J1.1 P6.3 | length 357.2
  Top Layer w50: J1.1 1593,1963.38 P6.3
24V: F1.2 P13.1 R10.2 R11.2 | length 2743.2
  Top Layer w50: P13.1 1057,4414 1057,4142 F1.2
  Bottom Layer w20: P13.1 1349,4290 2875,4290 R10.2 R11.2
24V_IN: J3.1 S2.2 | length 842
  Top Layer w50: S2.2 1118,3245.83 1118,3099 1277,2940 1415,2940 J3.1
595_OE: U2.96 U3.13 | length 522.4
  Top Layer w10: U3.13 2541,4009.74 2583.52,3967.22 U2.96
A: P2.3 R12.2 | length 85.9
  Bottom Layer w20: P2.3 2834.85,4774.62 R12.2
A_IN1: P15.1 U2.23 | length 2045.3
  Top Layer w10: v1(2372.11,3242) 2441.64,3242 U2.23 U2.23@2443.57,3243.93 ; v1(2909,3852) 2927.26,3852 2955.53,3880.27 2955.53,3995.27 3177.53,4217.27 3177.53,4270.95 P15.1
  Bottom Layer w10: v1(2372.11,3242) 2549,3418.89 2549,3619 2632.56,3702.56 2743.56,3702.56 2877,3836 2893,3836 v1(2909,3852)
A_IN2: P15.2 U2.24 | length 2044.5
  Top Layer w10: v1(2355,3214) 2353,3214 2359,3220 2381.23,3220 2383.69,3222.46 U2.24 ; v1(2964,3857) 2956.3,3857 2972.53,3873.23 2972.53,3946.53 3219.47,4193.47 3253.2,4193.47 3277.53,4217.8 3277.53,4256.53 3286,4265 3286,4281 P15.2
  Bottom Layer w10: v1(2355,3214) 2361,3220 2381.23,3220 2571,3409.77 2571,3606 2650.56,3685.56 2750.6,3685.56 2884.04,3819 2925.37,3819 2963.37,3857 v1(2964,3857)
A_IN3: P15.3 U2.25 | length 1966.4
  Top Layer w10: v1(2368.27,3183) 2388.05,3202.78 U2.25 ; v1(2998,3857) 2998,3942 3232.47,4176.47 3260.24,4176.47 3294.53,4210.76 3294.53,4238.53 3501.57,4445.57 P15.3
  Bottom Layer w10: v1(2368.27,3183) 2588,3402.73 2588,3598.96 2657.6,3668.56 2757.64,3668.56 2891.08,3802 2940.88,3802 2995.88,3857 v1(2998,3857)
A_IN4: P15.4 U2.26 | length 1813.2
  Top Layer w10: U2.26 2504.78,3241.78 v1(2507,3244) ; v1(3025,3858) 3025,3939 3245.47,4159.47 3267.28,4159.47 3311.53,4203.72 3311.53,4225.53 3433.15,4347.15 P15.4
  Bottom Layer w10: v1(2507,3244) 2605,3342 2605,3591.11 2665.44,3651.56 2764.68,3651.56 2898.12,3785 2957.11,3785 3025,3852.89 v1(3025,3858)
B: P2.2 R15.2 | length 85.9
  Bottom Layer w20: P2.2 2933.28,4774.53 R15.2
B_IN1: P16.1 U2.31 | length 2865.9
  Top Layer w10: v1(2601.43,2070.43) 2603.2,2072.2 2603.2,3011.56 2602,3012.76 2602,3138.58 U2.31 ; v1(2700,1875) 2819,1756 v1(2919,1756)
  Bottom Layer w10: v1(2601.43,2070.43) 2601,2070 2601,1974 v1(2700,1875) ; v1(2919,1756) 3335.47,1339.53 3335.47,1332.8 3361.8,1306.47 3645.2,1306.47 3663.88,1325.15 P16.1
B_IN2: P16.2 U2.32 | length 2781.2
  Top Layer w10: U2.32 2622,3138.9 2622,3069.2 2619,3066.2 2619,3019.8 2622,3016.8 2622,2456.11 2621,2455.11 2621,2081.96 2623.43,2079.54 2623.43,2061.31 2622.89,2060.78 2622.89,2030.11 v1(2627,2026) ; v1(2702,1928) 2842,1788 v1(2905,1788)
  Bottom Layer w10: v1(2627,2026) 2627,2003 v1(2702,1928) ; v1(2905,1788) 2920,1788 3301.53,1406.47 3645.2,1406.47 3662.3,1423.57 P16.2
B_IN3: P16.3 U2.35 | length 2651.9
  Top Layer w10: U2.35 2683.72,3138.01 2683.72,3065.39 2698,3051.11 2698,2504.15 2703,2499.15 2703,2466.85 2693,2456.85 v1(2693,2386) ; v1(2761,2287) 2761,1985 v1(2934,1812)
  Bottom Layer w10: v1(2693,2386) 2692,2386 2692,2356 v1(2761,2287) ; v1(2934,1812) 2960,1812 3265.53,1506.47 3645.2,1506.47 3660.73,1522 P16.3
B_IN4: P16.4 U2.36 | length 2567.1
  Top Layer w10: U2.36 2703.41,3138.01 2703.41,3069.74 2715,3058.15 2715,3028.89 2720,3023.89 2720,2423 v1(2718,2421) ; v1(2791,2299) 2791,2002 v1(2949,1844)
  Bottom Layer w10: v1(2718,2421) 2718,2371 2718.5,2371.5 v1(2791,2299) ; v1(2949,1844) 2960,1844 3197.53,1606.47 3645.2,1606.47 3659.15,1620.43 P16.4
BOOT0: R4.1 S1.4 U2.94 | length 1029.5
  Top Layer w10: U2.94 2623,3738.32 v1(2623,4023)
  Bottom Layer w10: v1(2623,4023) 2680,4080 3140,4080 S1.4
  Bottom Layer w20: S1.4 3309.2,4006 R4.1
BOOT1: R5.1 S1.3 U2.37 | length 1079.2
  Top Layer w9: 2986.87,3668.79 2987.26,3669.17 2987.26,3683.02 S1.3@3210.24,3906
  Top Layer w10: U2.37 2721.32,3228.2 2741,3247.89 2741,3436.76 2955.11,3650.87 2968.96,3650.87 2986.87,3668.79 ; S1.3@3210.24,3906 S1.3
  Bottom Layer w20: S1.3 3311.2,3906 R5.1
C: P2.11 R16.2 | length 86.3
  Bottom Layer w20: P2.11 2050,4855.45 R16.2
CLOSE: P8.4 U2.34 | length 1999.8
  Top Layer w10: U2.34 2661,3138.53 2661,3060.11 2653,3052.11 2653,3033.89 2664,3022.89 v1(2664,2483) ; v1(3009,2464) 3902.72,2464 P8.4
  Bottom Layer w10: v1(2664,2483) 2708,2483 2727,2464 v1(3009,2464)
CLOSEL: P7.12 U2.71 | length 1600.7
  Top Layer w10: U2.71 3204.41,3596.48 3216.89,3584 3300,3584 v1(3345,3629)
  Bottom Layer w10: v1(3345,3629) 3345,3739.49 3749,4143.49 3749,4429.7 P7.12
D: P2.10 R19.2 | length 86.2
  Bottom Layer w20: P2.10 2145.87,4775.26 R19.2
D+: J1.3 U5.5
D-: J1.2 U5.6
DCLOSE: P9.4 U2.29 | length 1922.7
  Top Layer w10: v1(2550,2302) 2566,2318 2566,3024.11 2563.83,3026.28 U2.29 ; v1(3001,2252) v1(3363.28,2252)
  Bottom Layer w10: v1(2550,2302) 2550,2284 2587,2247 2996,2247 v1(3001,2252) ; v1(3363.28,2252) P9.4
DFLOOR: P9.1 U2.38 | length 1762.3
  Top Layer w10: U2.38 2742.78,3138.01 2742.78,3088.22 2762,3069.01 2762,2359.11 2813,2308.11 2813,2122 v1(2817,2118) ; v1(3008,2118) v1(3228.9,2118)
  Bottom Layer w10: v1(2817,2118) v1(3008,2118) ; v1(3228.9,2118) 3228.45,2118.45 P9.1
DL: P2.8 R14.2 | length 86.1
  Bottom Layer w20: P2.8 2342.72,4775.08 R14.2
DLC: R13.1 U2.93 | length 317
  Top Layer w10: U2.93 2642.57,4006.57 R13.1
DOPEN: P9.9 U2.16 | length 2069.8
  Top Layer w10: v1(2336,2909) 2316,2909 2246.37,2978.63 2246.37,3301.33 2324.99,3379.94 U2.16 ; v1(3004,2652) 3271.15,2652 P9.9
  Bottom Layer w10: v1(2336,2909) 2345,2900 2459.43,2900 2707.43,2652 v1(3004,2652)
DP: P2.5 R23.2 | length 86
  Bottom Layer w20: P2.5 2638,4774.8 R23.2
DROUND: P9.10 U2.17 | length 2029.5
  Top Layer w10: v1(2363,2931) 2335,2931 2263.37,3002.63 2263.37,3294.29 2329.34,3360.26 U2.17 ; v1(3004,2685) 3205.72,2685 P9.10
  Bottom Layer w10: v1(2363,2931) 2452.47,2931 2701.47,2682 2709.47,2690 2714.47,2685 v1(3004,2685)
E: P2.9 R20.2 | length 86.2
  Bottom Layer w20: P2.9 2244.3,4775.17 R20.2
EN: P4.6 R28.2 U2.39 | length 1247.6
  Top Layer w10: U2.39 2762.46,3138.01 2762.46,3092.58 2781,3074.05 2781,2501 v1(2793,2489)
  Top Layer w20: R28.2 2437,2626.4 P4.6
  Bottom Layer w10: P4.6 2439,2741 2488.96,2741 2734.81,2495.15 2786.85,2495.15 v1(2793,2489)
F: P2.6 R21.2 | length 86.1
  Bottom Layer w20: P2.6 2539.57,4774.89 R21.2
G: P2.7 R22.2 | length 86.1
  Bottom Layer w20: P2.7 2441.15,4774.99 R22.2
GND: C1.2 C2.1 C3.1 C4.2 C5.2 C6.2 C7.2 C8.1 C9.1 C10.1 C11.1 C12.1 C13.1 C14.1 C15.1 C16.1 C17.1 C18.1 D1.1 D2.2 J1.4 J1.5 J1.6 J2.2 J2.3 J3.2 J3.3 P1.4 P1.6 P1.8 P1.10 P1.12 P1.14 P1.16 P1.18 P1.20 P2.1 P2.12 P4.4 P5.4 P9.3 P9.12 P12.1 P12.2 P12.3 P12.4 P12.5 P13.2 P14.2 P15.5 P16.5 R4.2 R5.2 R24.1 R25.1 S3.2 U1.1 U2.10 U2.19 U2.20 U2.27 U2.49 U2.74 U2.99 U3.8 U4.2 U4.4 U4.5 U4.7 U5.1 | length 21430.2
  Top Layer w10: D2.2 2308.2,4128.8 v1(2505,3932) 2524.46,3912.54 U2.99 2524.46,3478.54 ; v1(2234,3419) v1(2282,3419) ; U2.10@2440.01,3499.83 U2.10 2504.94,3498.06 2524.46,3478.54 ; U2.20 2495.67,3301.2 2523.47,3329 2524.46,3329 ; U2.19 2489.89,3320.89 2524.46,3355.46 ; v1(2515,3070) 2515,3072 2524.46,3081.46 U2.27 2524.46,3187.46 2531,3194 2531,3276.11 2524.46,3282.65 2524.46,3329 ; P1.12 2568,1380 2568,1492.2 v1(2526.2,1534) ; v1(2986,2937.6) 2955.22,2968.38 2955.22,3033.33 2957.54,3035.65 U2.49 2955.76,3141.57 2955.76,3182.64 2791,3347.39 2791,3462.32 2889.89,3561.2 2892.2,3561.2 2936,3605 2936,3606.11 2963.76,3633.87 2976,3633.87 2997.66,3655.54 U2.74 3160.95,3655.54 3169.49,3647 3221.4,3647 v1(3248.4,3674) ; 2524.46,3329 2524.46,3355.46 ; 2524.46,3355.46 2524.46,3425.46 v1(2527,3428) 2524.46,3430.54 2524.46,3478.54
  Top Layer w20: C6.2 1738.2,3454 C7.2 1741.2,3476.2 1769,3504 v1(2164,3504) ; P5.4 1869,2605 1869,2759 ; v1(1977,4126) 1985.55,4134.55 U1.1 2064.62,4128.8 D2.2 2144,4248.91 U3.8 ; P1.20 P1.18 P1.16 P1.14 P1.12 P1.10 P1.8 P1.6 P1.4 3075,1173 3553,1173 P12.1 P12.2 P12.3 P12.4 P12.5 ; S3.2 2004,2973 1869,2838 1869,2759 ; v1(2285,2229) 2285,2280 2253,2312 U5.1 2191.47,2325.53 2191.47,2697.47 P4.4 2178,2802 1912,2802 1869,2759 ; v1(2498,2238.2) 2526.2,2210 v1(2526.2,1534) ; v1(2986,2937.6) 3261.47,2937.6 P9.12 ; P9.3 3628,2212.3 P12.5 ; P16.5 3698.85,1718.85 P12.5
  Top Layer w50: v2(1053,4004) 1053,3059.39 1305.39,2807 J3.2 1428,2687 J3.3 1247,2426 J2.2 1247,2338 J2.3 1337,2122.39 J1.6 J1.5 1537.42,1618.03 J1.4 ; P13.2 1344,4501 1344,4774 P14.2 1514,4944 1863.02,4944 P2.12 1604,4512.98 C1.2 1675.2,4334.8 C2.1 1894.2,4334.8 1985.55,4243.45 U1.1
  Bottom Layer w10: R25.1 2195.2,3796.2 2331,3932 v1(2505,3932) ; v1(2282,3419) 2518,3419 v1(2527,3428) ; v1(2515,3070) 2513,3070 2498,3055 2498,2981.6 C17.1 C17.1@2544,2937.6
  Bottom Layer w20: D1.1 1808,4046 C4.2 ; C3.1 1827.6,4026.4 C4.2 ; v1(1977,4126) 1904,4126 C4.2 ; v1(2164,3504) 2209.72,3504 C18.1 C10.1 2231.2,3279 C11.1 2232,3173.2 2232,3029.24 2182.36,2979.6 v1(2178,2979.6) ; C13.1 C12.1@2359.6,1861 ; C9.1 v1(2285,2229) 2327,2229 2352,2204 ; C12.1 C12.1@2359.6,1861 ; v1(2498,2238.2) 2386.2,2238.2 2352,2204 ; R24.1@2511,1522 2523,1534 v1(2526.2,1534) ; C17.1@2544,2937.6 v1(2986,2937.6) ; P2.1 3031.7,4539.3 U4.7 3091,4590 3181,4590 U4.5 U4.4 ; U4.2 3087,4184 3185,4184 U4.4 ; v1(3248.4,3674) 3387,3812.6 R5.2 R4.2 3387,4084 U4.4 ; P15.5 3249.72,4248.72 U4.4 ; 2352,2204 2352,1868.6 C12.1@2359.6,1861
  Bottom Layer w50: v2(1053,4004) 1141,4092 P13.2
JTCK: P1.9 R24.2 U2.76 | length 2632.1
  Top Layer w9: v1(2907,3647) 2918,3658 2938.9,3658 2948.28,3667.37 2962.12,3667.37 2971.26,3676.51 2971.26,3689.65 2977.22,3695.61 U2.76
  Top Layer w10: v1(2601,1534) 2601,1567 v1(2717,1683)
  Bottom Layer w10: v1(2717,1683) 3040,2006 3040,3554 2947,3647 v1(2907,3647)
  Bottom Layer w20: v1(2601,1534) 2618,1517 P1.9 P1.9@2613,1435
JTDI: P1.5 R8.1 U2.77 | length 2776.5
  Top Layer w9: v1(2870,3647) 2908.37,3685.37 2945.06,3685.37 2955.26,3695.57 2955.26,3735.93 U2.77
  Top Layer w10: P1.5 2867,1381 2957,1381 2973,1397 2973,2502.89 2972.85,2503.04 2972.85,2521.26 2973,2521.41 2973,2918 2922,2969 v1(2922,3056) ; v1(2958,3537) 2949,3546 2949,3577.11 2958,3586.11 v1(2958,3597)
  Bottom Layer w10: v1(2870,3647) 2920,3597 v1(2958,3597) ; v1(2922,3056) 2922,3501 v1(2958,3537)
  Bottom Layer w20: R8.1 2814,1434 P1.5
JTDO: P1.13 R6.1 U2.89 | length 2581.9
  Top Layer w10: P1.13 2418,1568 v1(2492,1642) ; v1(2696.33,3231.46) 2720.64,3255.78 2721.32,3692.79 U2.89 ; v1(2737,2009) 2740,2009 2740,2276.89 2739,2277.89 2739,2296.11 2740,2297.11 2740,3035 v1(2737,3038)
  Bottom Layer w10: v1(2492,1642) 2498.11,1642 2724,1867.89 2724,2004 2729,2009 v1(2737,2009) ; v1(2696.33,3231.46) 2703.27,3235 2737,3201.27 v1(2737,3038)
  Bottom Layer w20: R6.1 2415,1433 P1.13
JTMS: P1.7 R7.1 U2.72 | length 2582.6
  Top Layer w10: v1(2712,1521.6) v1(2712,1643) ; U2.72 3215.83,3616.17 v1(3226,3606)
  Bottom Layer w10: v1(2712,1643) 2712,1645.11 2941.89,1875 2944,1875 3226,2157 v1(3226,3606)
  Bottom Layer w20: v1(2712,1521.6) 2712,1436 P1.7
LIGHT: P7.7 R29.2 | length 202.3
  Top Layer w10: R29.2 3803.77,4152.57 P7.7
LIGHTC: R29.1 U2.67 | length 1036.1
  Top Layer w10: U2.67 3382.74,3517.74 3777,3912 R29.1@3777,4048
NetC6_1: C6.1 U2.13 Y1.1 | length 714.7
  Top Layer w10: C6.1 1961,3249 Y1.1 2165.69,3441.69 2334.43,3441.69 2337.11,3439 U2.13
NetC7_1: C7.1 U2.12 Y1.2 | length 638.1
  Top Layer w10: C7.1 1953,3457 Y1.2 1982.69,3458.69 U2.12
NetC12_2: C12.2 U5.7 Y2.2 | length 390.1
  Top Layer w20: U5.7 2281.4,2012 v1(2436.4,1857)
  Bottom Layer w20: Y2.2 2437.4,1799.4 C12.2 v1(2436.4,1857)
NetC13_2: C13.2 U5.8 Y2.1 | length 280.5
  Top Layer w20: v1(2186.2,1861) 2135,1912.2 2135,1947 2150,1962 U5.8
  Bottom Layer w20: v1(2186.2,1861) 2186.2,1801.8 Y2.1
NetD2_1: D2.1 R1.2 | length 98.3
  Top Layer w20: v1(2058,4024.4) 2114.4,4024.4 D2.1
NetD3_1: D3.1 U2.1 | length 150.2
  Top Layer w10: D3.1 2345.4,3695.6 2365.78,3675.22 U2.1
NetD3_2: D3.2 R25.2
  other v1: 2270,3742
NetD4_2: D4.2 R27.1
  other v1: 2040.2,2192
NetD5_2: D5.2 R26.2
  other v1: 2040,2283
NetF1_1: F1.1 S2.1 | length 252.2
  Top Layer w50: S2.1 1220,3773 F1.1
NetF2_1: F2.1 S2.6 | length 273.6
  Top Layer w50: S2.6 1447,3574.83 F2.1
NetP1_19: P1.19 P3.1 | length 339.5
  Top Layer w20: P1.19@2116,1432 P1.19
  Top Layer w50: P3.1 2027,1339 P1.19
NetR2_1: R2.1 S1.2 | length 158.7
  Bottom Layer w20: R2.1 2835,3827 S1.2
NetR3_1: R3.1 S1.1 | length 159.6
  Bottom Layer w20: R3.1 2833,3925 S1.1
NetR10_1: R10.1 R14.1 U4.8 | length 1113.2
  Bottom Layer w20: R14.1 2345,4405 2427,4323 2724,4323 U4.8 2936,4431.8 R10.1
NetR11_1: R11.1 R18.1 U4.6 | length 616.6
  Top Layer w20: v1(2738,4699) 2781,4742 2937,4742 3136,4543 U4.6
  Bottom Layer w20: U4.6 3136,4438.8 R11.1
NetR12_1: R12.1 U3.15 | length 539.3
  Top Layer w20: U3.15 2641,4309 2839,4507 v1(2839,4698)
  Bottom Layer w20: R12.1 v1(2839,4698)
NetR13_2: R13.2 U4.1 | length 308.4
  Top Layer w20: R13.2 2796.2,4235 U4.1
NetR15_1: R15.1 U3.1 | length 409.9
  Bottom Layer w20: v1(2693,4444) 2693,4551 2790,4648 2885,4648 R15.1
NetR16_1: R16.1 U3.2 | length 882.6
  Top Layer w20: v1(2051,4697) 2139,4785 2497,4785 2641,4641 U3.2
  Bottom Layer w20: R16.1 v1(2051,4697)
NetR17_2: R17.2 U4.3 | length 392.5
  Top Layer w20: R17.2 3016.4,4115.4 U4.3
NetR19_1: R19.1 U3.3 | length 706.5
  Top Layer w20: v1(2150,4696.33) 2206.67,4753 2476,4753 2591,4638 U3.3
  Bottom Layer w20: R19.1 v1(2150,4696.33)
NetR20_1: R20.1 U3.4 | length 535.4
  Top Layer w20: v1(2246.67,4698) 2273.67,4725 2457,4725 2541,4641 U3.4
NetR21_1: R21.1 U3.5 | length 277.6
  Bottom Layer w20: v1(2492,4441) 2492,4648.33 R21.1
NetR22_1: R22.1 U3.6 | length 254.1
  Bottom Layer w20: v1(2443,4444) 2443.33,4444.33 R22.1
NetR23_1: R23.1 U3.7 | length 579.4
  Bottom Layer w20: v1(2391,4447) 2391,4407 2437,4361 2528,4361 2566,4399 2566,4624 R23.1
NRST: C5.1 P1.15 S3.1 U2.14 | length 2715.5
  Top Layer w10: v1(2178,3248.59) 2178,3285 2290,3397 2291.11,3397 2304,3409.89 2304,3411 2312.32,3419.32 U2.14
  Top Layer w20: v1(2178,3248.59) 1830,2900.59 1830,1918 P1.15
  Bottom Layer w10: C5.1 v1(2178,3248.59)
NTRST: P1.3 R9.1 U2.90 | length 2556.7
  Top Layer w10: v1@2661,3232.09 v1(2661,3231) 2701.63,3271.63 U2.90 ; v1(2675,3043) 2681,3037 2681,2497.11 2686,2492.11 2686,2473.89 2676,2463.89 2676,2429.11 2655,2408.11 2655,1782.6 2918,1519.6 P1.3
  Bottom Layer w10: v1(2661,3231) 2661,3234 2675,3220 v1(2675,3043)
  Bottom Layer w20: R9.1 2916,1432 P1.3
OPEN: P8.3 U2.33 | length 2081
  Top Layer w10: U2.33 2642.57,3065.73 2636,3059.15 2636,3026.85 2642.57,3020.27 2642.57,2492.69 2642,2492.11 2642,2473.89 2642.57,2473.31 2642.57,2446.43 v1(2643,2446) ; v1(3006,2360) 3908.3,2360 P8.3
  Bottom Layer w10: v1(2643,2446) 2646,2443 2727.11,2443 2810.11,2360 v1(3006,2360)
OPENL: P8.11 U2.59 | length 1036.4
  Top Layer w10: U2.59 3475.33,3360.26 3478.01,3357.57 3698.13,3357.57 P8.11
RCLK: U2.97 U3.12 | length 535
  Top Layer w10: U3.12 2491,4024.89 2563.83,3952.06 U2.97
RUN: P8.12 U2.63 | length 1067
  Top Layer w10: U2.63 3267.89,3439 3270.89,3442 3289.11,3442 3292.11,3439 3777,3439 3965,3251 P8.12
RUNL: P8.5 U2.53 | length 1431.2
  Top Layer w10: U2.53 3040.72,3242.65 3314.54,3242.65 3315.89,3244 3558.38,3244 3566.53,3235.85 3566.53,2898.62 P8.5
RX: P4.3 P5.2 R26.1 U2.69 U5.2 | length 1460.5
  Top Layer w10: v1(2974,3568) 2974,3567 2982.11,3558.89 3038.43,3558.89 U2.69
  Top Layer w20: P4.3 2137,2537 P5.2
  Bottom Layer w10: P4.3 2137,2747.11 2907.09,3517.2 2908.11,3517.2 2921,3530.09 2921,3531.11 2957.89,3568 v1(2974,3568)
SCLK: U2.98 U3.11 | length 547.5
  Top Layer w10: U3.11 2441,4040.05 2544.15,3936.9 U2.98
SDI: U2.95 U3.14 | length 509.8
  Top Layer w10: U3.14 2591,3994.58 2603.2,3982.37 U2.95
STATE: P4.1 U2.40 | length 2069.2
  Top Layer w10: P4.1 1937,2629 v1(1954,2612) ; U2.40 2782.15,3138.01 2782.15,3096.94 2800,3079.09 2800,2513.11 2830,2483.11 2830,2282 v1(2843,2269)
  Bottom Layer w10: v1(1954,2612) 2404.89,2612 2751.89,2265 2770.11,2265 2774.11,2269 v1(2843,2269)
STOP: P7.1 U2.64 | length 966.9
  Top Layer w10: U2.64 3040.53,3459 3296.15,3459 3296.47,3458.69 3860.66,3458.69 P7.1
STOPL: P7.11 U2.70 | length 1538.2
  Top Layer w10: U2.70@3040.21,3577.96 3198.88,3577.96 3209.85,3567 3332,3567 v1(3366,3601)
  Bottom Layer w10: v1(3366,3601) 3367,3602 3367,3638.11 3366,3639.11 3366,3736.44 3766,4136.44 3766,4348.28 P7.11
TX: P4.2 P5.3 R27.2 U2.68 U5.3 | length 1563.3
  Top Layer w10: v1(2899,3539.2) 2923.2,3515 2967.11,3515 2980,3527.89 2980,3529.89 2987.11,3537 2989.11,3537 2991.32,3539.2 3038.43,3539.2 U2.68
  Top Layer w20: P4.2 2037,2537 P5.3
  Bottom Layer w10: P4.2 2037.11,2743 2531,3236.89 2531,3237 2834,3540 2835,3539 2835.2,3539.2 v1(2899,3539.2)
UL: P2.4 R18.2 | length 86
  Bottom Layer w20: P2.4 2736.43,4774.71 R18.2
ULC: R17.1 U2.92 | length 356.5
  Top Layer w10: U2.92 2662.26,3909.86 R17.1
pads on no net: P1.11 P1.17 S2.3 S2.4 U2.2 U2.3 U2.4 U2.5 U2.41 U2.42 U2.43 U2.44 U2.45 U2.46 U2.47 U2.48 U2.51 U2.73 U2.81 U2.82 U2.83 U2.84 U2.85 U2.86 U2.87 U2.88 U2.91 U3.9 U5.9 U5.10 U5.11 U5.12 U5.13 U5.14 U5.15

## Polygon pours and split planes (outlines as drawn)
GND on Top Layer "GND_L01_P000" (solid, remove dead copper, pour order 0): 1000,5000 4508,5000 4508,1100 1000,1100
GND on Bottom Layer "GND_L02_P002" (solid, remove dead copper, pour order 2): 1000,5000 4508,5000 4508,1100 1000,1100

## Keep-outs
Top Layer:
  lines w10: 1000,1100 4508,1100 4508,5000 1000,5000 1000,1100

## Silkscreen, mask and mechanical layers (free items; w line width, h text height)
Top Overlay:
  drawing of 3635 lines, arcs and shapes, not listed
  text "GND" at 1919,4738 h60 r270
  text "C" at 2017.27,4738 h60 r270
  text "D" at 2115.55,4738 h60 r270
  text "E" at 2213.82,4738 h60 r270
  text "DL" at 2312.09,4738 h60 r270
  text "G" at 2410.36,4738 h60 r270
  text "F" at 2508.64,4738 h60 r270
  text "DP" at 2606.91,4738 h60 r270
  text "UL" at 2705.18,4738 h60 r270
  text "A" at 2803.45,4738 h60 r270
  text "B" at 2901.73,4738 h60 r270
  text "GND" at 3000,4738 h60 r270
  text "GND" at 1483,4659 h36 r180
  text "5V" at 1661,4657 h36 r180
  text "RUN" at 4136,4633 h36
  text "IN1" at 3324,4604 h36
  text "24V" at 1369,4542 h36 r270
  text "STOPL" at 4136,4536 h36
  text "IN2" at 3314,4511.25 h36
  text "2US" at 4136,4438 h36
  text "IN3" at 3314,4418.5 h36
  text "2DS" at 4136,4338 h36
  text "GND" at 1369,4334 h36 r270
  text "IN4" at 3314,4325.75 h36
  text "3US" at 4136,4236 h36
  text "GND" at 3309,4233 h36
  text "LIGHT" at 4136,4143 h36
  text "4SWL" at 4136,4049 h36
  text "3SWL" at 4136,3947 h36
  text "BOOT0 1|0 / BOOT1 1|0" at 3304,3905 h60
  text "4DL" at 4136,3860 h36
  text "3DS" at 4136,3766 h36
  text "4DS" at 4136,3663 h36
  text "STOP" at 4136,3553 h36
  text "GND" at 3301.99,3191 h36
  text "RUN" at 3743.99,3167 h36
  text "designed by 刘慧鹏" at 4403,3118 h70 r90
  text "1US" at 3306.99,3091.18 h36
  text "OPENL" at 3684.01,3069.18 h36
  text "DROUND" at 3212.02,2991.36 h36
  text "1UL" at 3748.99,2971.36 h36
  text "DOPEM" at 3242.01,2891.54 h36
  text "2DL" at 3743.99,2873.54 h36
  text "STATE" at 1953,2811 h36 r90
  text "TX" at 2053.4,2811 h36 r90
  text "RX" at 2153.8,2811 h36 r90
  text "GND" at 2254.2,2811 h36 r90
  text "5V" at 2354.6,2811 h36 r90
  text "EN" at 2455,2811 h36 r90
  text "1SW" at 3306.99,2791.73 h36
  text "2UL" at 3743.99,2775.73 h36
  text "2SW" at 3301.99,2691.91 h36
  text "3DL" at 3743.99,2677.91 h36
  text "3SW" at 3301.99,2592.09 h36
  text "3UL" at 3743.99,2580.09 h36
  text "4SW" at 3301.99,2492.27 h36
  text "RUNL" at 3714,2482.27 h36
  text "5V_DC" at 1678,2430 h36
  text "TX" at 2046.67,2403.99 h36 r90
  text "RX" at 2150.33,2403.99 h36 r90
  text "5V" at 2254,2403.99 h36 r90
  text "DCLOSE" at 3212.02,2392.45 h36
  text "CLOSE" at 3684.01,2384.45 h36
  text "GND" at 1943,2374 h36 r90
  text "GND" at 3301.99,2292.64 h36
  text "OPEN" at 3714,2286.64 h36
  text "5V_USB" at 1668,2226 h36
  text "5V" at 3331.98,2192.82 h36
  text "2SWL" at 3714,2188.82 h36
  text "DFLOOR" at 3212.02,2093 h36
  text "1SWL" at 3719,2091 h36
  text "GND" at 3795,1710 h36
  text "IN4" at 3800,1611.25 h36
  text "IN3" at 3800,1512.5 h36
  text "电梯主控板V2.0" at 4412,1454 h250 r90
  text "IN2" at 3800,1413.75 h36
  text "IN1" at 3810,1315 h36
  text "5V_JTAG" at 1730,1279 h36 r90

## Text inside footprints (layer, text, board x,y; h text height)
P1: Top Overlay "20" at 2058,1350 h50 r180; Top Overlay "19" at 2058,1450 h50 r180; Top Overlay "1" at 3118,1450 h50 r180; Top Overlay "2" at 3118,1350 h50 r180